# Altium PCB STM32_PCB.PcbDoc (part 1 of 3)
Units mm, origin at the board's own origin, x right, y up, seen from the top; angles counter-clockwise.
Board outline 112.45 x 84.2 mm, 4 copper layers (Top Layer, Int1 (GND), Int2 (PWR), Bottom Layer), stack 1.479 mm thick; 174 components, 200 nets, 660 pads, 398 vias.
Unrouted connection lines stored in the file: 12.
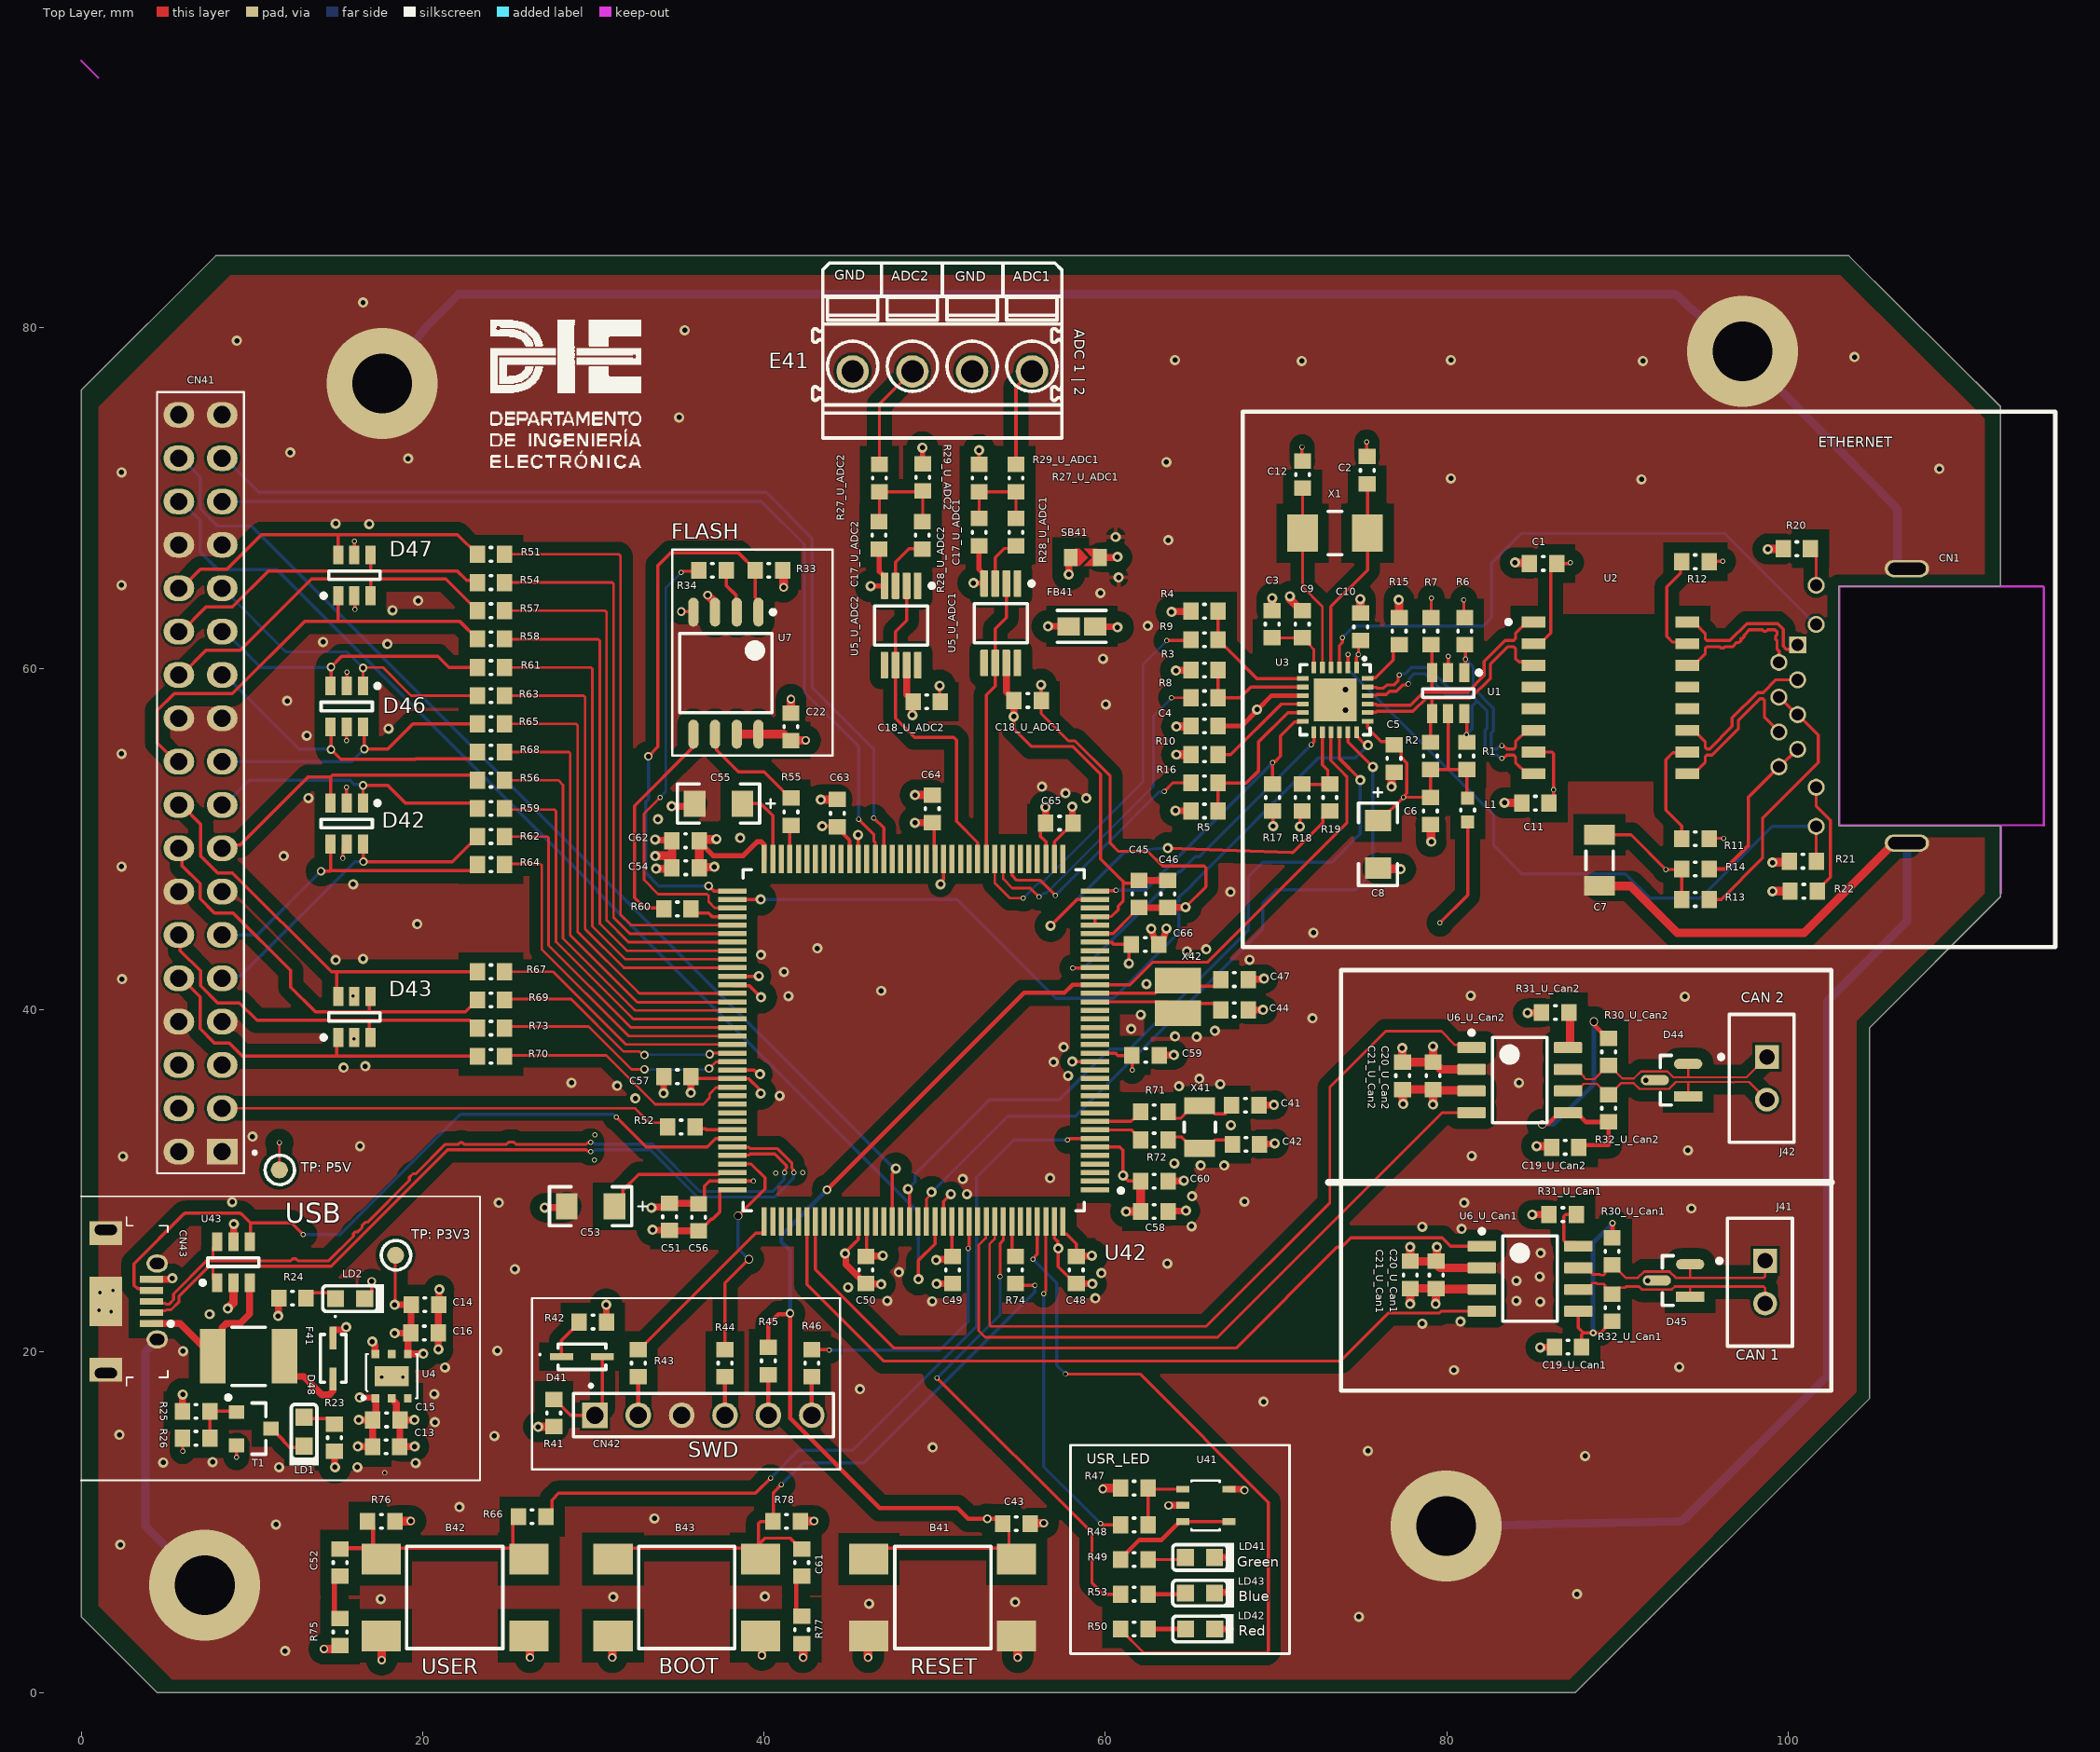
[diagram p0: Top Layer view]
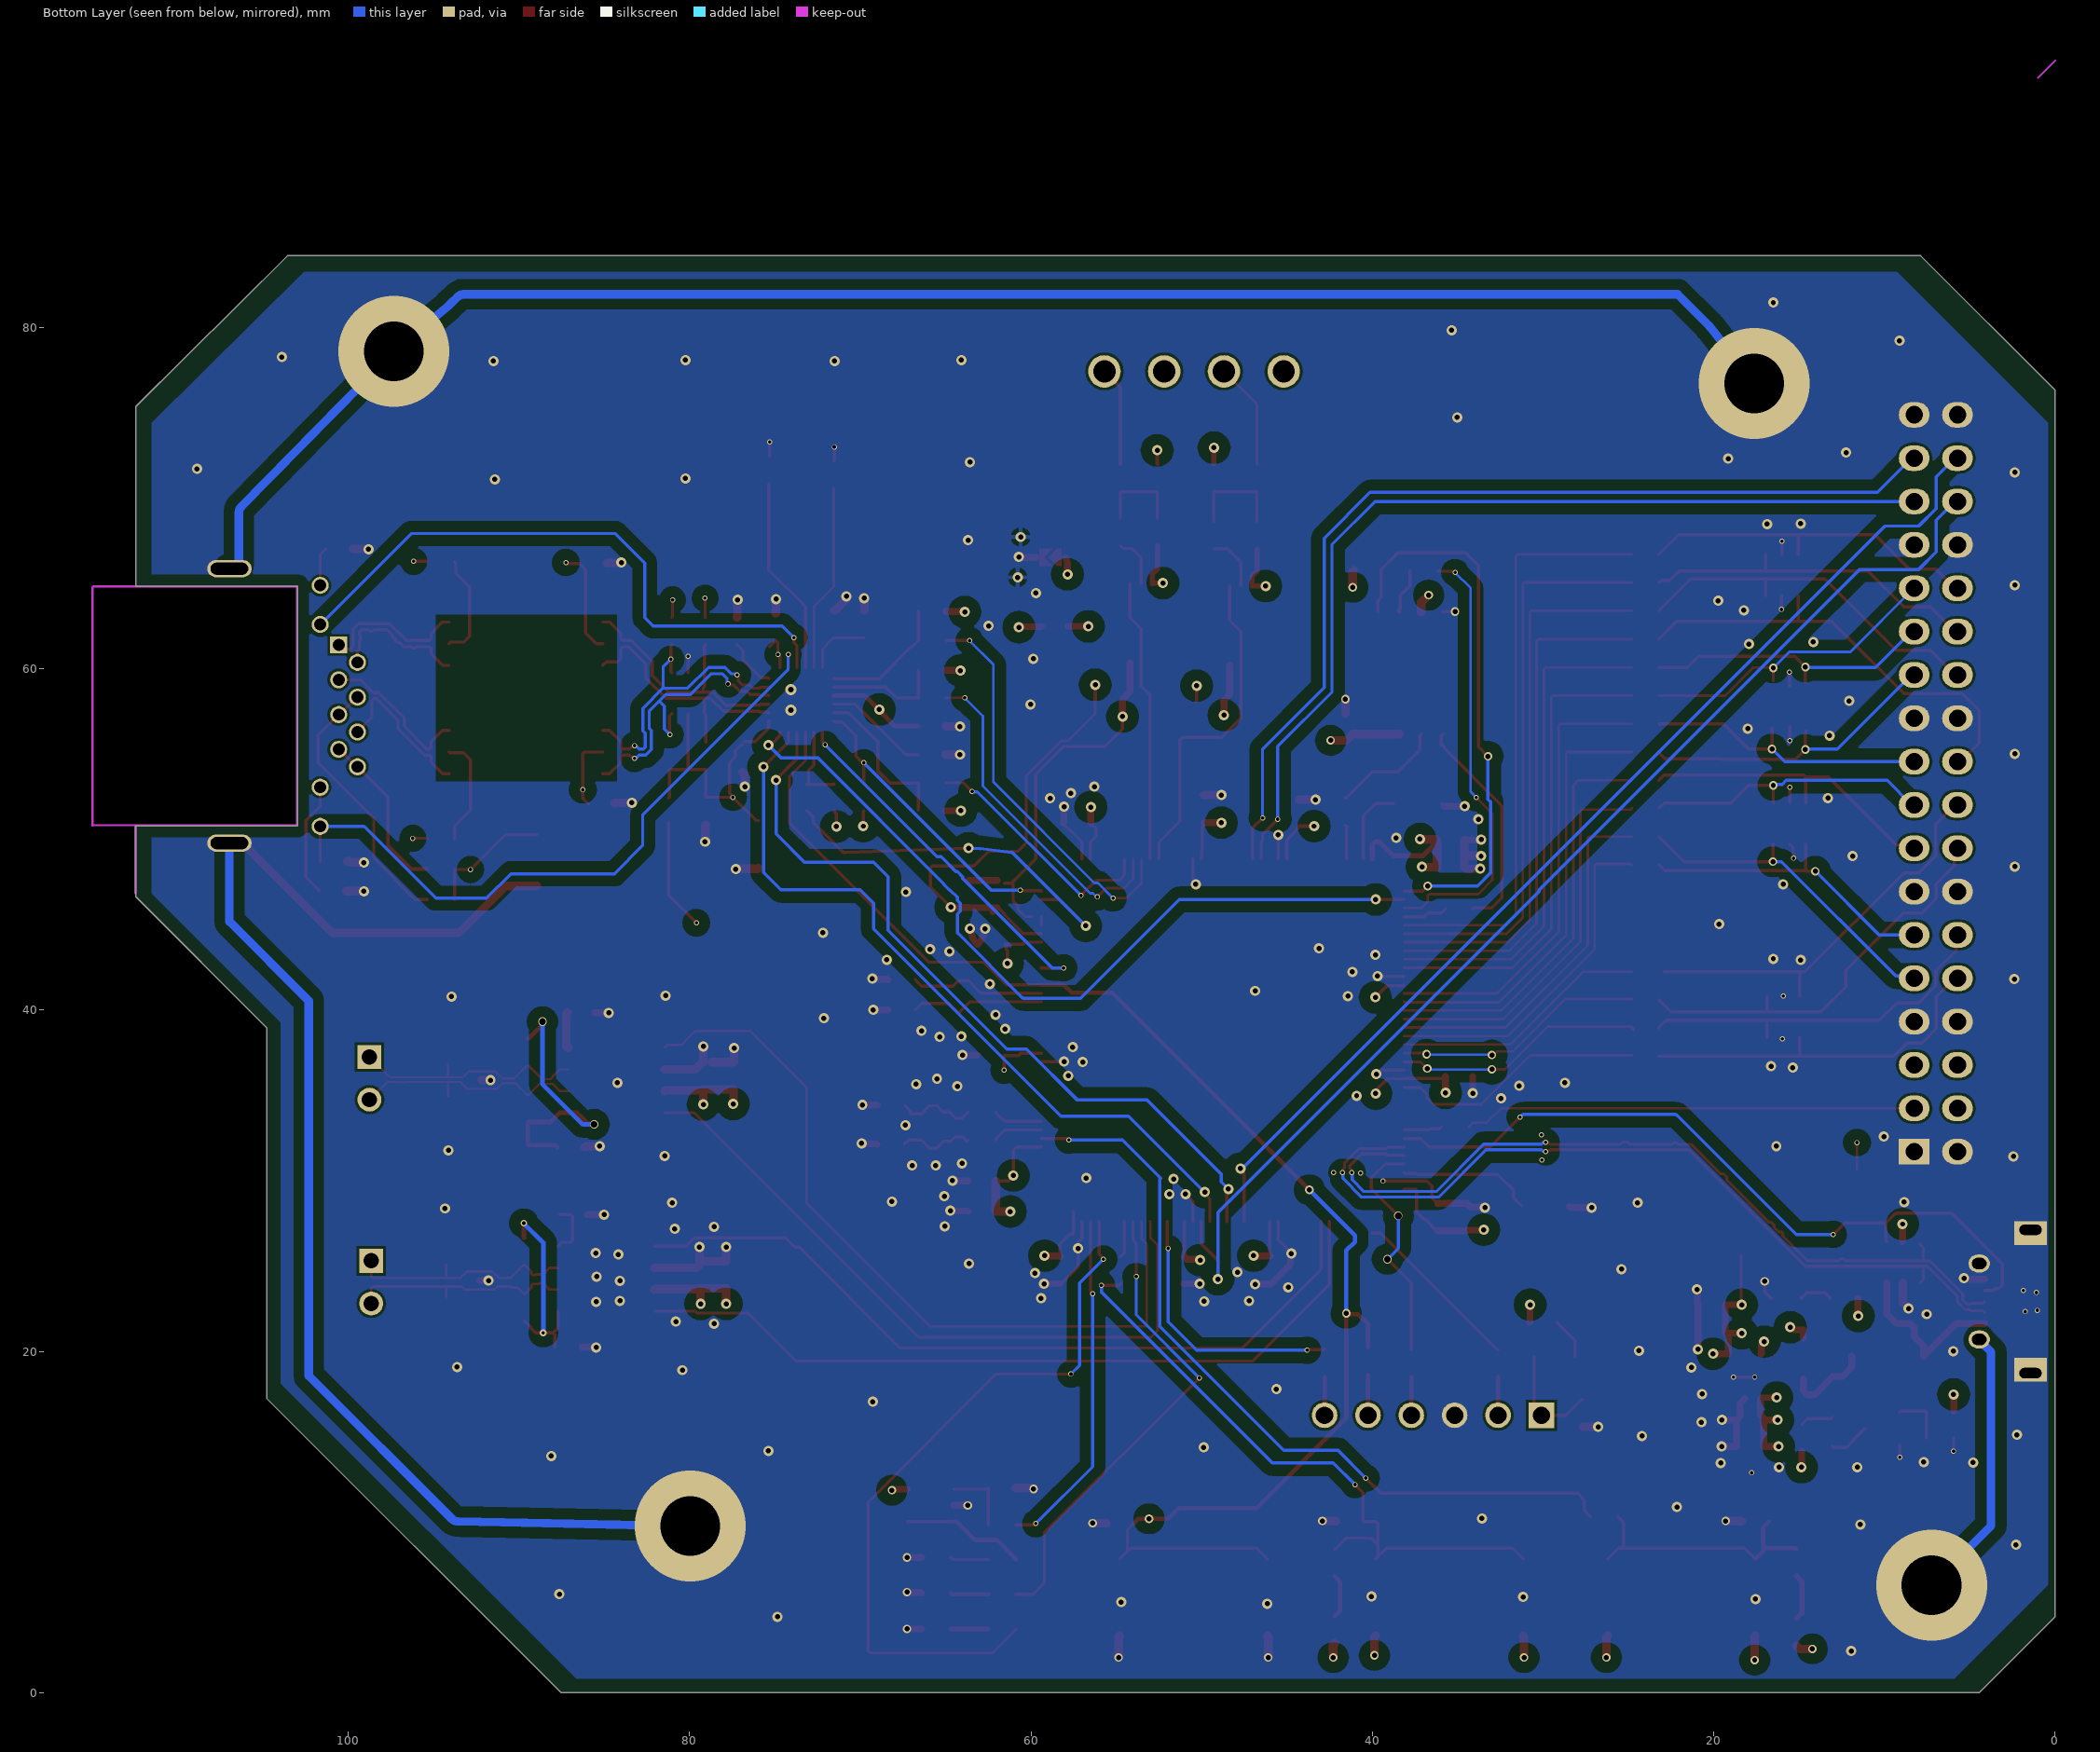
[diagram p1: Bottom Layer view, seen from below]
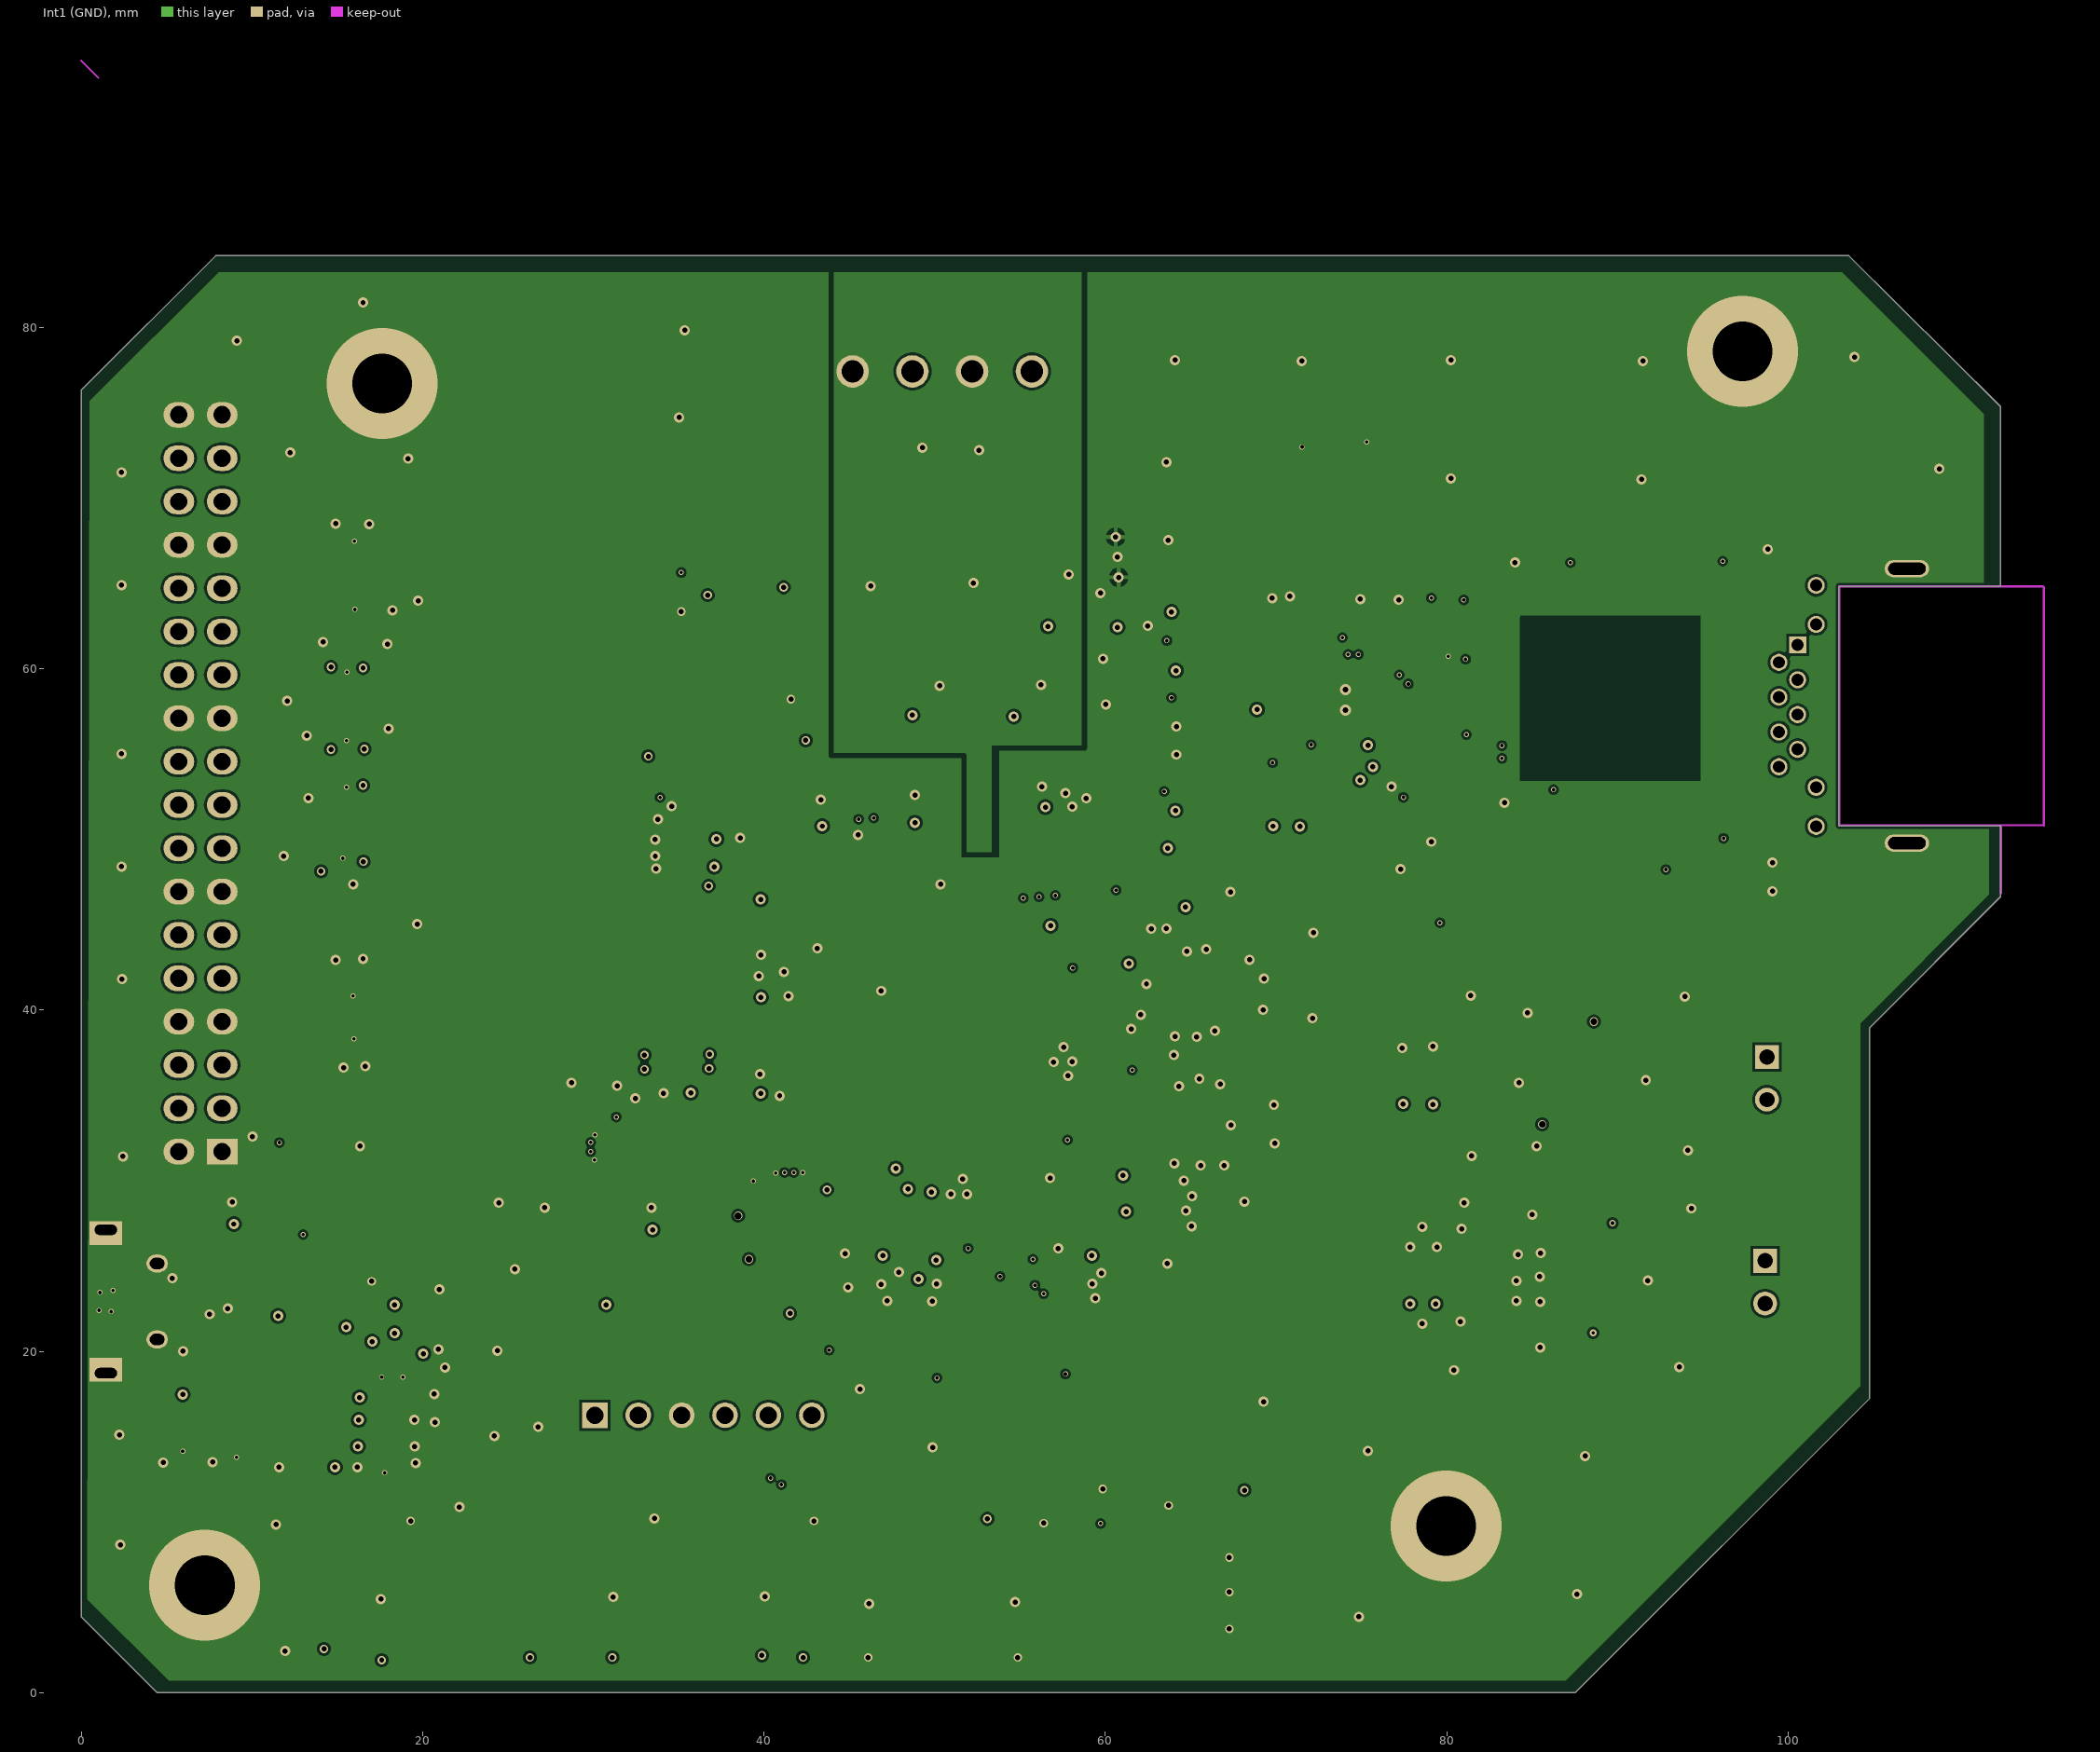
[diagram p2: Int1 (GND)]
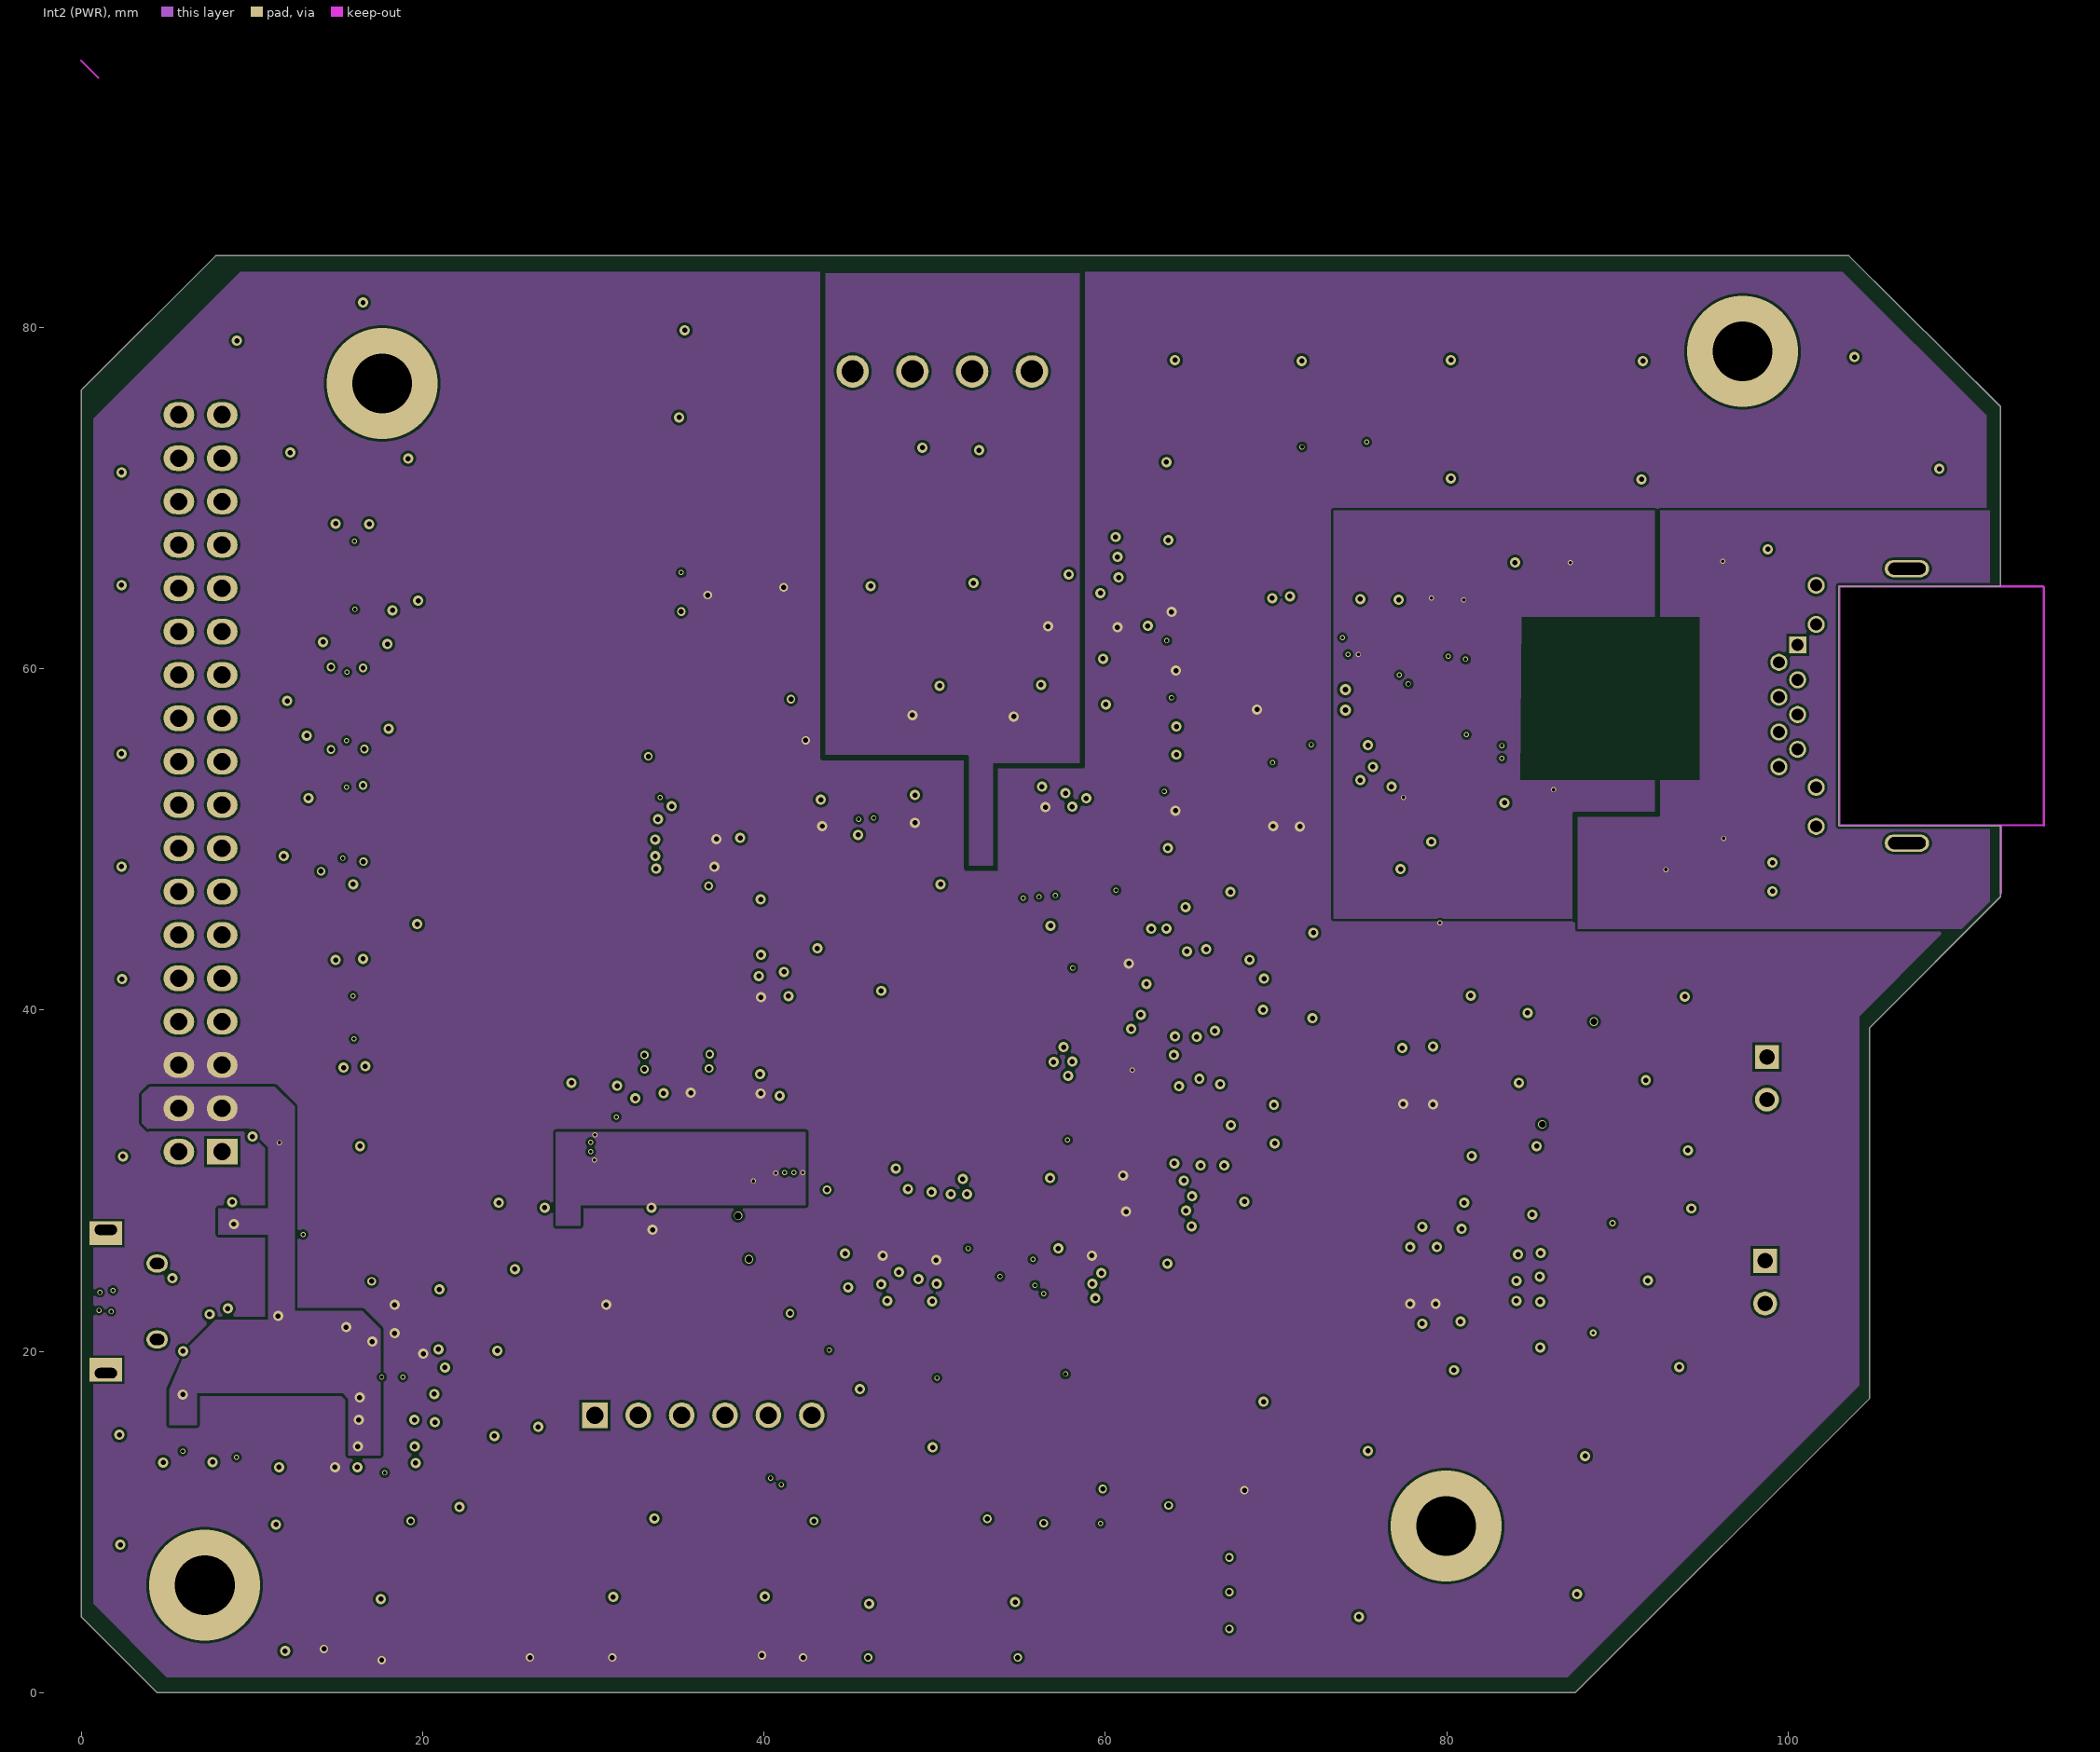
[diagram p3: Int2 (PWR)]

## Layer stack, top to bottom
Top Solder: solder mask 0.0254, SM-001, Dk 4
Top Layer: signal copper 0.0175
Dielectric 1: prepreg 0.066, PP-004, Dk 3.8
Dielectric 2: prepreg 0.0711, PP-006, Dk 4.1
Int1 (GND): signal copper 0.035
Dielectric 3: core 1.1, Core-039, Dk 4.8
Int2 (PWR): signal copper 0.035
Dielectric 4: prepreg 0.0711, PP-006, Dk 4.1
Dielectric 5: prepreg 0.066, PP-004, Dk 3.8
Bottom Layer: signal copper 0.0175
Bottom Solder: solder mask 0.0254, SM-001, Dk 4

## Board outline
112.446,50.825 112.42,50.8 102.972,50.8 102.972,64.795 102.997,64.821 112.446,64.821 112.446,75.362 103.556,84.201 7.874,84.201 0,76.327 0,4.445 4.445,0 62.306,0 87.528,0 104.776,17.247 104.776,38.964 112.446,46.634

## Design rules (kind name [scope] priority, off if disabled: settings)
Clearance Clearance_DiffPair_Via_N [InNet('DATA_N') vs InNet('DATA_N')] p1: gap=0.6 ignorepadtopadclearanceinfootprint=FALSE // Data N
Clearance Clearance_DiffPair_Via_P [InNet('DATA_P') vs InNet('DATA_P')] p2: gap=0.6 ignorepadtopadclearanceinfootprint=FALSE // Data P
Clearance Clearance_top [OnLayer('Top Layer')] p3: gap=0.15 ignorepadtopadclearanceinfootprint=TRUE except(0.65: Arc-Fill Arc-Poly Arc-Region Track-Fill Track-Poly Track-Region SMDPad-Fill SMDPad-Poly SMDPad-Region Via-Fill Via-Poly Via-Region)
Clearance Clearance_bot [OnLayer('Bottom Layer')] p4: gap=0.15 ignorepadtopadclearanceinfootprint=TRUE except(0.65: Arc-Fill Arc-Poly Arc-Region Track-Fill Track-Poly Track-Region SMDPad-Fill SMDPad-Poly SMDPad-Region Via-Fill Via-Poly Via-Region)
Clearance [All] p5: gap=0.15 ignorepadtopadclearanceinfootprint=TRUE
DiffPairsRouting DiffPairsRouting_ethernet_Td [InDifferentialPair('TD')] p1: maxlimit=0.181 minlimit=0.181 mostfreqgap=0.181 toplayer_maxgap=0.181 toplayer_prefgap=0.181 toplayer_minwidth=0.182 toplayer_maxwidth=0.182 toplayer_prefwidth=0.182 bottomlayer_mingap=0.181 bottomlayer_minwidth=0.182 bottomlayer_maxwidth=0.182 bottomlayer_prefwidth=0.182 impedanceprofiledriven=TRUE impedanceprofileid={E97F621E-118A-47BD-B1E5-0E9AAD145150} impedanceprofilevalue=100.000000 maxuncoupledlength=12.7
DiffPairsRouting DiffPairsRouting_ethernet_Tx [InDifferentialPair('TX')] p2: maxlimit=0.181 minlimit=0.181 mostfreqgap=0.181 toplayer_maxgap=0.181 toplayer_prefgap=0.181 toplayer_minwidth=0.182 toplayer_maxwidth=0.182 toplayer_prefwidth=0.182 bottomlayer_mingap=0.181 bottomlayer_minwidth=0.182 bottomlayer_maxwidth=0.182 bottomlayer_prefwidth=0.182 impedanceprofiledriven=TRUE impedanceprofileid={E97F621E-118A-47BD-B1E5-0E9AAD145150} impedanceprofilevalue=100.000000 maxuncoupledlength=12.7
DiffPairsRouting DiffPairsRouting_ethernet_Rd [InDifferentialPair('RD')] p3: maxlimit=0.181 minlimit=0.181 mostfreqgap=0.181 toplayer_maxgap=0.181 toplayer_prefgap=0.181 toplayer_minwidth=0.182 toplayer_maxwidth=0.182 toplayer_prefwidth=0.182 bottomlayer_mingap=0.181 bottomlayer_minwidth=0.182 bottomlayer_maxwidth=0.182 bottomlayer_prefwidth=0.182 impedanceprofiledriven=TRUE impedanceprofileid={E97F621E-118A-47BD-B1E5-0E9AAD145150} impedanceprofilevalue=100.000000 maxuncoupledlength=12.7
DiffPairsRouting DiffPairsRouting_ethernet_Rx [InDifferentialPair('RX')] p4: maxlimit=0.181 minlimit=0.181 mostfreqgap=0.181 toplayer_maxgap=0.181 toplayer_prefgap=0.181 toplayer_minwidth=0.182 toplayer_maxwidth=0.182 toplayer_prefwidth=0.182 bottomlayer_mingap=0.181 bottomlayer_minwidth=0.182 bottomlayer_maxwidth=0.182 bottomlayer_prefwidth=0.182 impedanceprofiledriven=TRUE impedanceprofileid={E97F621E-118A-47BD-B1E5-0E9AAD145150} impedanceprofilevalue=100.000000 maxuncoupledlength=12.7
DiffPairsRouting DiffPairsRouting_usb [InDifferentialPair('DATA')] p5: maxlimit=0.15 minlimit=0.15 mostfreqgap=0.15 toplayer_minwidth=0.17 toplayer_maxwidth=0.17 toplayer_prefwidth=0.19 bottomlayer_minwidth=0.17 bottomlayer_maxwidth=0.17 bottomlayer_prefwidth=0.19 impedanceprofiledriven=TRUE impedanceprofileid={497333D0-593B-4ACD-B705-0FEA8F89A51E} impedanceprofilevalue=90.000000 maxuncoupledlength=12.7
DiffPairsRouting DiffPairsRouting_can1 [InDifferentialPair('CAN_U_Can1')] p6: maxlimit=0.874 minlimit=0.2 mostfreqgap=0.874 toplayer_mingap=0.363 toplayer_maxgap=0.363 toplayer_prefgap=0.363 toplayer_minwidth=0.15 toplayer_maxwidth=0.15 toplayer_prefwidth=0.15 bottomlayer_mingap=0.363 bottomlayer_maxgap=0.363 bottomlayer_prefgap=0.363 bottomlayer_minwidth=0.15 bottomlayer_maxwidth=0.15 bottomlayer_prefwidth=0.15 impedanceprofiledriven=TRUE impedanceprofileid={274D2B74-3016-48D9-B676-2E77227BFF66} impedanceprofilevalue=120.000000 maxuncoupledlength=12.7
DiffPairsRouting DiffPairsRouting_can2 [InDifferentialPair('CAN_U_Can2')] p7 off: maxlimit=0.874 minlimit=0.2 mostfreqgap=0.874 toplayer_mingap=0.363 toplayer_maxgap=0.363 toplayer_prefgap=0.363 toplayer_minwidth=0.15 toplayer_maxwidth=0.15 toplayer_prefwidth=0.15 bottomlayer_mingap=0.363 bottomlayer_maxgap=0.363 bottomlayer_prefgap=0.363 bottomlayer_minwidth=0.15 bottomlayer_maxwidth=0.15 bottomlayer_prefwidth=0.15 impedanceprofiledriven=TRUE impedanceprofileid={274D2B74-3016-48D9-B676-2E77227BFF66} impedanceprofilevalue=120.000000 maxuncoupledlength=12.7
HoleSize [All] p1: absolutevalues=TRUE maxlimit=3.5 minlimit=0.2 maxpercent=80.000 minpercent=20.000
MatchedLengths "Schematic Matched Net Lengths_7" [InNet('PA1')] p1: tolerance=2 checknetsindiffpair=FALSE checkdiffpairvsdiffpair=TRUE checkxsignals=TRUE checkothers=TRUE
MatchedLengths "Schematic Matched Net Lengths_6" [InNet('PG11')] p2: tolerance=2 checknetsindiffpair=FALSE checkdiffpairvsdiffpair=TRUE checkxsignals=TRUE checkothers=TRUE
MatchedLengths "Schematic Matched Net Lengths_5" [InNet('PG13')] p3: tolerance=2 checknetsindiffpair=FALSE checkdiffpairvsdiffpair=TRUE checkxsignals=TRUE checkothers=TRUE
MatchedLengths "Schematic Matched Net Lengths_4" [InNet('PB13')] p4: tolerance=2 checknetsindiffpair=FALSE checkdiffpairvsdiffpair=TRUE checkxsignals=TRUE checkothers=TRUE
MaxMinImpedance [All] p1: minimum=50.00 maximum=120.0
MinimumSolderMaskSliver [All] p1: minsoldermaskwidth=0.07
OvershootFalling OvershootEthernet [InNet('RD_N')] p1: maximum=500.0m
OvershootRising [All] p1: maximum=1.000
PlaneClearance [All] p1: clearance=0.3
PlaneConnect [All] p1: planeconnectstyle=Direct reliefexpansion=0.508 reliefentries=4 reliefconductorwidth=0.254 reliefairgap=0.254
PolygonConnect [All] p1: connectstyle=Direct reliefconductorwidth=0.254 reliefentries=4 polygonreliefangle="90 Angle" airgapwidth=0.254
RoomDefinition U_MCU_144 [InComponentClass('U_MCU_144')] p1 off: confinementstyle=ConfineIn formatcopy=TRUE lockcomponents=FALSE outline 30.861,20.066 70.231,20.066 70.231,54.229 30.861,54.229
RoomDefinition U_Ethernet [InComponentClass('U_Ethernet')] p2 off: confinementstyle=ConfineIn formatcopy=TRUE lockcomponents=FALSE outline 70.866,43.942 127,43.942 127,75.057 70.866,75.057
RoomDefinition U_Connectors [InComponentClass('U_Connectors')] p3 off: confinementstyle=ConfineIn formatcopy=TRUE lockcomponents=FALSE outline 2.159,29.718 28.067,29.718 28.067,77.343 2.159,77.343
RoomDefinition U_USB [InComponentClass('U_USB')] p4 off: confinementstyle=ConfineIn formatcopy=TRUE lockcomponents=FALSE outline -0.127,11.811 20.701,11.811 20.701,29.083 -0.127,29.083
RoutingVias RoutingVias_DiffPairs [InDifferentialPairClass('All Differential Pairs')] p1: holewidth=0.2 width=0.3 viastyle="Through Hole" minholewidth=0.2 minwidth=0.3 maxholewidth=0.3 maxwidth=0.5
RoutingVias RoutingVias_generic [All] p2: holewidth=0.4 width=0.5 viastyle="Through Hole" minholewidth=0.2 minwidth=0.3 maxholewidth=1 maxwidth=1.2 // Via metalizada generica para clase 6
SignalStimulus Ethernet [All] p1: kind=1 level=0 starttime=10.00n stoptime=30.00n periodtime=40.00n
SilkToSilkClearance [All] p1: silktosilkclearance=0.15
SilkToSolderMaskClearance [IsPad] p1: minsilkscreentomaskgap=0.125 clearancetoexposedcopper=TRUE
SolderMaskExpansion [All] p1: expansion=0 istentingtop=FALSE
SupplyNets "Schematic Supply Nets_4" [InNet('GND')] p1: voltage=0.000
SupplyNets "Schematic Supply Nets_5" [InNet('AVDD')] p2: voltage=0.000
SupplyNets "Schematic Supply Nets_3" [InNet('USB_PWR')] p3: voltage=0.000
SupplyNets "Schematic Supply Nets_2" [InNet('P3V3')] p4: voltage=0.000
SupplyNets "Schematic Supply Nets" [InNet('AGND')] p5: voltage=0.000
UndershootFalling [All] p1: maximum=1.000
UndershootRising [All] p1: maximum=500.0m
UnpouredPolygon UnpouredPolygon_1 [All] p1:
UnpouredPolygon [All] p2:
Width Width_RMII_TX [InNetClass('RMII_TX')] p1: maxlimit=0.249 minlimit=0.19 preferedwidth=0.23 toplayer_prefwidth=0.249 bottomlayer_maxwidth=0.23 impedanceprofiledriven=TRUE impedanceprofileid={1FD0D523-0561-4C48-BDE8-8C62BAB84EE3} impedanceprofilevalue=50.000000 minimp=50.000000 maximp=50.000000 favimp=50.000000
Width Width_generic_50 [All] p2: maxlimit=1 minlimit=0.15 preferedwidth=0.23 toplayer_prefwidth=0.249 impedanceprofiledriven=TRUE impedanceprofileid={1FD0D523-0561-4C48-BDE8-8C62BAB84EE3} impedanceprofilevalue=50.000000 minimp=50.000000 maximp=50.000000 favimp=50.000000 // Ancho de pista generico clase 6
22 further rules are at their usual default settings.

## Classes and differential pairs
net class ConG[2..8]: ConG2 ConG3 ConG4 ConG5 ConG6 ConG7 ConG8
net class ConD[8..15]: ConD8 ConD9 ConD10 ConD11 ConD12 ConD13 ConD14 ConD15
channel class CAN: U_Can1 U_Can2
channel class ADC: U_ADC1 U_ADC2
net class PH[0..2]: PH0 PH1 PH2
net class PG[0..15]: PG0 PG1 PG2 PG3 PG4 PG5 PG6 PG7 PG8 PG9 PG10 PG11 PG12 PG13 PG14 PG15
net class PF[0..15]: PF0 PF1 PF2 PF3 PF4 PF5 PF6 PF7 PF8 PF9 PF10 PF11
net class PE[0..15]: PE0 PE1 PE2 PE3 PE4 PE5 PE6 PE7 PE8 PE9 PE10 PE11 PE12 PE13 PE14 PE15
net class PD[0..15]: PD0 PD1 PD2 PD3 PD4 PD5 PD6 PD7 PD8 PD9 PD10 PD11 PD12 PD13 PD14 PD15
net class PC[0..15]: PC0 PC1 PC2 PC3 PC4 PC5 PC6 PC7 PC8 PC9 PC10 PC11 PC12 PC13 PC14 PC15
net class PB[0..15]: PB0 PB1 PB2 PB3 PB4 PB5 PB6 PB7 PB8 PB9 PB10 PB11 PB12 PB13 PB14 PB15
net class PA[0..15]: PA0 PA1 PA2 PA3 PA4 PA5 PA6 PA7 PA8 PA9 PA10 PA11 PA12 PA13 PA14 PA15
component class U_USB: CN43 D6 D46 F41 U43
component class U_MCU_144: B42 B43 C41 C42 C43 C45 C46 C47 C52 C53 C56 C57 C59 C62 C63 FB41 LD43 R20 R21 R35 R51 R53 R54 R57 R59 R60 R63 R65 R66 R70 R73 R75 R78 SB41 U42 X41 X42
component class U_Flash: C22 R33 R34 U7
component class U_Ethernet: C1 C2 C3 C6 C8 C9 C12 CN1 L1 R1 R2 R3 R4 R7 R8 R9 R12 R17 R18 R19 R20 R21 R22 U1 U2 U3 X1
component class U_Connectors: CN41 CN42 D41 D42 D43 D45 D46 E41 J41 J42 LD41 R41 R42 R43 R44 R45 R46 R47 R48 R49 U41
component class U_Can2: C19_c2 C19_U_Can2 C20_c2 C20_U_Can2 C21_U_Can2 R30_U_Can2 R31_U_Can2 R32_U_Can2 U6_U_Can2
component class U_Can1: C19_U_Can1 C21_U_Can1 R30_U_Can1 R31_U_Can1 R32_U_Can1 U6_U_Can1
component class U_Alimentacion: * C13 C14 C15 C16 LD1 LD2 R23 R24 R25 R26 T1 U4
component class U_ADC2: C18_U_ADC2 R27_U_ADC2 R28_U_ADC2 R29_U_ADC2 U5_U_ADC2
component class U_ADC1: C18_U_ADC1 R27_U_ADC1 R28_U_ADC1 R29_U_ADC1 U5_U_ADC1
differential pair TX: +TX_P -TX_N
differential pair RX: +RX_P -RX_N
differential pair TD: +TD_P -TD_N
differential pair RD: +RD_P -RD_N
differential pair DATA: +DATA_P -DATA_N
differential pair CAN_U_Can2: +CAN_U_Can2_P -CAN_U_Can2_N
differential pair CAN_U_Can1: +CAN_U_Can1_P -CAN_U_Can1_N

## Components (designator, comment, footprint, x,y, rotation, side; value= is the part's Value field where it differs from the comment)
B41 "RESET (Black)" PB-6X6mm-Black 50.47,5.581 r180 top
B42 "USER (Blue)" PB-6X6mm-Blue 21.895,5.581 r0 top
B43 "BOOT0" PB-6X6mm-Blue 35.484,5.581 r0 top
C1 "100nF" 0603C 85.649,66.167 r0 top
C2 "30pF" 0603C 75.336,71.628 r90 top value=100nF
C3 "470pF" 0603C 69.774,62.611 r270 top value=100nF
C4 "100nF" 0603C 65.805,56.642 r0 top
C5 "100nF" 0603C 76.911,54.737 r90 top
C6 "100nF" 0603C 79.045,51.664 r90 top
C7 "TC1206KKX7RDBB102" 1206C 88.951,48.768 r90 top value=100nF
C8 "10uF" TAN-A 75.971,49.708 r90 top
C9 "1uF_X5R_0603" 0603C 71.533,62.611 r90 top value=1µF
C10 "100nF" 0603C 74.955,62.459 r270 top
C11 "100nF" 0603C 85.192,52.121 r0 top
C12 "30pF" 0603C 71.552,71.374 r90 top value=100nF
C13 "1uF" 0603C 17.859,14.402 r0 top value=1µF
C14 "1uF" 0603C 20.134,22.738 r0 top value=1µF
C15 "100nF" 0603C 17.882,15.977 r180 top
C16 "100nF" 0603C 20.109,21.075 r180 top
C17_U_ADC1 "100nF" 0603C 52.603,67.996 r270 top (schematic designator C17)
C17_U_ADC2 "100nF" 0603C 46.736,67.818 r270 top (schematic designator C17)
C18_U_ADC1 "100nF" 0603C 55.448,58.141 r0 top (schematic designator C18)
C18_U_ADC2 "100nF" 0603C 49.53,58.064 r0 top (schematic designator C18)
C19_U_Can1 "4.7nF" 0603C 87.1,20.254 r180 top (schematic designator C19)
C19_U_Can2 "4.7nF" 0603C 86.944,31.953 r180 top (schematic designator C19)
C20_U_Can1 "47uF" 0603C 79.381,24.48 r270 top (schematic designator C20)
C20_U_Can2 "47uF" 0603C 79.197,36.144 r270 top (schematic designator C20)
C21_U_Can1 "100nF" 0603C 77.857,24.48 r270 top (schematic designator C21)
C21_U_Can2 "100nF" 0603C 77.419,36.144 r270 top (schematic designator C21)
C22 "100nF" 0603C 41.58,56.591 r270 top
C41 "4.3pF[N/A]" 0603C 68.199,34.417 r0 top
C42 "4.3pF[N/A]" 0603C 68.237,32.131 r0 top
C43 "100nF" 0603C 54.788,9.906 r180 top value=100pF
C44 "4.3pF" 0603C 67.564,40.005 r0 top
C45 "100nF" 0603C 61.969,46.799 r270 top value=10nF
C46 "1uF" 0603C 63.652,46.799 r270 top value=10nF
C47 "4.3pF" 0603C 67.564,41.783 r0 top
C48 "100nF" 0603C 58.293,24.765 r270 top value=10nF
C49 "100nF" 0603C 51.054,24.765 r270 top value=10nF
C50 "100nF" 0603C 45.974,24.765 r270 top value=10nF
C51 "100nF" 0603C 34.463,27.877 r90 top value=10nF
C52 "100nF" 0603C 15.164,7.62 r90 top value=100pF
C53 "2.2uF_X7R" TAN-A 29.845,28.499 r0 top value=2.2uF
C54 "10uF_X5R_0603" 0603C 35.408,48.336 r180 top value=1µF
C55 "2.2uF_X7R" TAN-A 37.338,52.095 r0 top value=2.2uF
C56 "100nF" 0603C 36.17,27.851 r90 top value=10nF
C57 "100nF" 0603C 34.925,36.093 r180 top value=10nF
C58 "100nF" 0603C 62.865,28.194 r0 top value=10nF
C59 "100nF" 0603C 62.357,37.338 r0 top value=10nF
C60 "1uF_X5R_0603" 0603C 62.865,29.972 r0 top value=1µF
C61 "100nF" 0603C 42.215,7.62 r90 top value=100pF
C62 "100nF" 0603C 35.404,49.916 r180 top value=10nF
C63 "100nF" 0603C 44.298,51.537 r90 top value=10nF
C64 "100nF" 0603C 49.86,51.791 r90 top value=10nF
C65 "100nF" 0603C 57.302,50.952 r0 top value=10nF
C66 "4.7uF_X5R_0603" 0603C 62.332,43.84 r0 top value=1µF
CN1 "KRJ-CB4.2GYZNL" RJ45_KRJ-CB4.2GYZNL 103.209,57.822 r90 top
CN41 "Header 18X2_Male" HDR_2x18_2R54_V_M 8.255,31.699 r90 top
CN42 "Header 6X1" HDR_1x6_2R54_V_M 30.099,16.256 r0 top
CN43 "475900001" MOLEX_47590001 4.12,22.921 r270 top
D41 "BAT60JFILM" SOD-323 29.337,19.685 r180 top
D42 "ESDA6V1BC6" SOT23-6L 15.552,50.927 r270 top
D43 "ESDA6V1BC6" SOT23-6L 16.002,39.592 r90 top
D44 "PESD2CANFD24V-TR" FP-SOT23-IPC_A 93.167,35.89 r180 top
D45 "PESD2CANFD24V-TR" FP-SOT23-IPC_A 93.282,24.151 r180 top
D46 "ESDA6V1BC6" SOT23-6L 15.552,57.785 r270 top
D47 "ESDA6V1BC6" SOT23-6L 16.002,65.475 r90 top
D48 "BAT60JFILM" SOD-323 14.757,19.583 r90 top
E41 "1845040000" LM_3_5_90_04 50.444,77.673 r180 top
F41 "MF-MSMF050-2" FP-MF-MSMF050-2-MFG 9.804,19.71 r180 top value=0.15-1Ω
FB41 "BLM18PG121SN1D" FP-BLM18-0_15-t0_8-IPC_A 58.623,62.484 r180 top
J41 "B2B-EH-A(LF)(SN)" FP-B2B-EH-A_LF_SN-MFG 98.349,24.054 r270 top
J42 "B2B-EH-A(LF)(SN)" FP-B2B-EH-A_LF_SN-MFG 98.455,35.997 r270 top
L1 "BEAD" 0603L 81.229,51.714 r90 top value=100uH
LD1 "Green" 0603D-G 13.056,15.291 r90 top
LD2 "Green" 0603D-G 15.748,23.089 r180 top
LD41 "Green" 0603D-G 65.546,7.925 r180 top
LD42 "Red" 0603D-R 65.552,3.734 r180 top
LD43 "Blue" 0603D-B 65.544,5.832 r180 top
R1 "50" 0603R 81.178,54.889 r270 top
R2 "50" 0603R 79.045,54.889 r270 top
R3 "10K" 0603R 65.805,59.917 r0 top
R4 "10K" 0603R 65.805,63.373 r0 top
R5 "10K" 0603R 65.805,51.662 r0 top
R6 "50" 0603R 81.051,62.205 r90 top
R7 "50" 0603R 79.07,62.205 r90 top
R8 "33" 0603R 65.805,58.293 r180 top
R9 "33" 0603R 65.805,61.695 r180 top
R10 "10K" 0603R 65.805,54.964 r180 top
R11 "75" 0603R 94.564,50.038 r180 top value=50
R12 "75" 0603R 94.564,66.269 r180 top value=50
R13 "75" 0603R 94.564,46.482 r0 top value=50
R14 "75" 0603R 94.564,48.26 r0 top value=50
R15 "12K1" 0603R 77.216,62.205 r90 top
R16 "33" 0603R 65.805,53.313 r180 top
R17 "1K5" 0603R 69.799,52.451 r270 top
R18 "10K" 0603R 71.526,52.451 r90 top
R19 "33" 0603R 73.152,52.451 r270 top
R20 "270" 0603R 100.508,67.031 r180 top value=10K
R21 "10K" 0603R 100.863,48.717 r180 top
R22 "270" 0603R 100.914,46.965 r180 top value=10K
R23 "330" 0603R 14.834,14.935 r270 top value=1K
R24 "1K" 0603R 12.37,23.114 r180 top value=10K
R25 "47K" 0603R 6.731,16.485 r0 top value=1K
R26 "22K" 0603R 6.731,14.91 r0 top value=1K
R27_U_ADC1 "100K" 0603R 54.762,71.171 r90 top value=10K (schematic designator R27)
R27_U_ADC2 "100K" 0603R 46.761,71.171 r90 top value=10K (schematic designator R27)
R28_U_ADC1 "1K" 0603R 54.762,67.996 r270 top value=10K (schematic designator R28)
R28_U_ADC2 "1K" 0603R 49.276,67.818 r270 top value=10K (schematic designator R28)
R29_U_ADC1 "220K" 0603R 52.603,71.171 r270 top value=10K (schematic designator R29)
R29_U_ADC2 "220K" 0603R 49.301,71.209 r270 top value=10K (schematic designator R29)
R30_U_Can1 "60 Ohm" 0603R 89.687,25.857 r270 top value=60 (schematic designator R30)
R30_U_Can2 "60 Ohm" 0603R 89.484,37.541 r270 top value=60 (schematic designator R30)
R31_U_Can1 "0 Ohm" 0603R 86.792,28.016 r180 top value=1K (schematic designator R31)
R31_U_Can2 "0 Ohm" 0603R 86.36,39.853 r180 top value=1K (schematic designator R31)
R32_U_Can1 "60 Ohm" 0603R 89.687,22.555 r270 top value=60 (schematic designator R32)
R32_U_Can2 "60 Ohm" 0603R 89.484,34.239 r270 top value=60 (schematic designator R32)
R33 "10k" 0603R 40.284,65.761 r0 top value=1K
R34 "33" 0603R 36.982,65.761 r0 top value=1K
R41 "10K" 0603R 27.686,16.383 r270 top
R42 "100" 0603R 29.972,21.717 r0 top value=10K
R43 "22" 0603R 32.639,19.304 r90 top value=10K
R44 "22" 0603R 37.719,19.304 r90 top value=10K
R45 "22" 0603R 40.259,19.431 r90 top value=10K
R46 "22" 0603R 42.799,19.304 r90 top value=10K
R47 "200K" 0603R 61.697,11.989 r180 top value=1K
R48 "10K" 0603R 61.697,9.83 r180 top value=1K
R49 "510" 0603R 61.697,7.798 r0 top value=1K
R50 "1K" 0603R 61.697,3.734 r180 top
R51 "100" 0603R 24.003,66.7 r180 top value=10K
R52 "10k" 0603R 35.154,33.147 r0 top value=1K
R53 "680" 0603R 61.697,5.766 r0 top value=1K
R54 "100" 0603R 24.003,65.049 r180 top value=10K
R55 "33" 0603R 41.587,51.62 r90 top
R56 "100" 0603R 24.003,53.467 r0 top value=10K
R57 "100" 0603R 24.003,63.398 r180 top value=10K
R58 "100" 0603R 24.003,61.747 r180 top value=10K
R59 "100" 0603R 24.003,51.816 r0 top value=10K
R60 "33" 0603R 34.925,45.923 r180 top value=1K
R61 "100" 0603R 24.003,60.071 r180 top value=10K
R62 "100" 0603R 24.003,50.165 r180 top value=10K
R63 "100" 0603R 24.003,58.42 r0 top value=10K
R64 "100" 0603R 24.003,48.514 r180 top value=10K
R65 "100" 0603R 24.003,56.769 r180 top value=10K
R66 "330" 0603R 26.416,10.312 r0 top value=1K
R67 "100" 0603R 24.003,42.24 r0 top value=10K
R68 "100" 0603R 24.003,55.118 r0 top value=10K
R69 "100" 0603R 24.003,40.589 r0 top value=10K
R70 "100" 0603R 24.003,37.287 r0 top value=10K
R71 "0" 0603R 62.865,34.036 r180 top value=1K
R72 "0" 0603R 62.865,32.385 r180 top value=1K
R73 "100" 0603R 24.003,38.938 r0 top value=10K
R74 "330" 0603R 54.737,24.765 r270 top value=1K
R75 "100" 0603R 15.164,3.556 r90 top value=1K
R76 "220K" 0603R 17.577,10.033 r0 top value=1K
R77 "100" 0603R 42.215,3.683 r90 top value=1K
R78 "220K" 0603R 41.326,10.033 r0 top value=1K
SB41 "Close" SB_0603 58.826,66.523 r180 top
T1 "9013" SOT-23 10.109,15.469 r270 top
U1 "USBLC6-4SC6" SOT23-6L 80.086,58.572 r270 top
U2 "KMS-1102NL" Transformer 89.586,58.293 r270 top
U3 "LAN8742A-CZ-TR" QFN24_0R5_4X4 73.462,58.178 r270 top
U4 "LD39050PU33R" DFN6_0R95_3x3_TP 18.186,18.542 r0 top
U5_U_ADC1 "OPA350EA/250" DGK0008A_M 53.873,62.662 r270 top (schematic designator U5)
U5_U_ADC2 "OPA350EA/250" DGK0008A_M 48.031,62.535 r270 top (schematic designator U5)
U6_U_Can1 "SN65HVD230QDRG4Q1" D0008A_M 84.881,24.257 r0 top (schematic designator U6)
U6_U_Can2 "SN65HVD230QDRG4Q1" D0008A_M 84.277,35.89 r0 top (schematic designator U6)
U7 "SST25VF040B-50-4I-S2AF" MCHP-SOIC-S2A8_N 37.77,59.741 r270 top
U41 "TSV631AILT" SOT-23-5L 65.888,10.973 r0 top
U42 "MCU_LQFP144" "LQFP144_0R5_SKT - sin_zocalo_UWU" 48.768,38.227 r90 top
U43 "USBLC6-4SC6" SOT23-6L 8.915,25.222 r90 top
X1 "X53T-C20SSA-25.000MHz" XTAL_2SM_5R0X3R2 73.457,67.945 r0 top
X41 "NX3215SA-32.768KHZ-EXS00A-MU00525" XTAL_2SM_3R2X1R5 65.532,33.147 r270 top
X42 "NX3225GD-8.000M-EXS00A-CG04874" OSC_2SM_3R2x2R5 64.262,40.767 r270 top

## Footprints (in the part's own frame and the unit in brackets; to place one, negate y for a bottom-side part, rotate by r counter-clockwise, add the part's x,y. Pads: shape width x height; smd on the part's side, far side on the other; paste and mask are expansions set on the pad)
0603C [mm] "Chip Capacitor, Body 1.6x0.8mm, Height 1.0mm, IPC Medium Density"
  rect 0.9x1 smd: 1(-0.8,0) 2(0.8,0)
  silkscreen extent -0.05,-0.4 0.05,0.4, body extent -0.87,-0.48 0.88,0.47, height 1
0603D-B [mm] "LED, SMT, Body 1.6 x 0.8 mm, 0.25mm Thickness"
  rect 1x1 smd paste+0 mask+0: 1(0.85,0) 2(-0.85,0)
  silkscreen extent -1.99,-0.85 1.6,0.85, body extent -0.8,-0.4 0.8,0.4, height 0.25
0603D-G [mm] "LED, SMT, Body 1.6 x 0.8 mm, 0.25mm Thickness"
  rect 1x1 smd paste+0 mask+0: 1(0.85,0) 2(-0.85,0)
  silkscreen extent -1.99,-0.85 1.6,0.85, body extent -0.8,-0.4 0.8,0.4, height 0.25
0603D-R [mm] "LED, SMT, Body 1.6 x 0.8 mm, 0.25mm Thickness"
  rect 1x1 smd paste+0 mask+0: 1(0.85,0) 2(-0.85,0)
  silkscreen extent -1.97,-0.86 1.6,0.84, body extent -0.8,-0.4 0.8,0.4, height 0.25
0603L [mil] "Bead 0603L"
  rect 30x30 smd: 1(27.5,0) 2(-27.5,0)
  silkscreen extent -2,-16 2,16, body extent -34,-19 34,19, height 24
0603R [mm] "Chip Resistor, Body 1.6x0.8mm, IPC Medium Density"
  rect 0.9x1 smd: 1(-0.8,0) 2(0.8,0)
  silkscreen extent -0.05,-0.4 0.05,0.4, body extent -0.85,-0.47 0.85,0.47, height 0.6
1206C [mm] "Chip Capacitor, Body 3.2x1.6mm, Height 1mm, IPC Medium Density"
  rect 1.15x1.8 smd: 1(-1.5,0) 2(1.5,0)
  silkscreen extent -0.55,-0.8 0.55,0.8, body extent -1.7,-0.9 1.7,0.9, height 1
D0008A_M [mm] "SOIC, 8-Leads, Body 5x4mm, Pitch 1.27mm, IPC Low Density"
  rrect15% 1.65x0.65 smd: 1(-2.825,1.905) 2(-2.825,0.635) 3(-2.825,-0.635) 4(-2.825,-1.905) 5(2.825,-1.905) 6(2.825,-0.635) 7(2.825,0.635) 8(2.825,1.905)
  silkscreen extent -2.95,-2.5 1.6,2.9, body extent -3,-2.45 3,2.45, height 1.63
DFN6_0R95_3x3_TP [mm] "500 mA low quiescent current and low noise voltage regulator"
  rect 2x1.2 smd: 0(0,0)
  rect 0.45x0.5 smd: 1(-0.95,-1.3) 2(0,-1.3) 3(0.95,-1.3) 4(0.95,1.3) 5(0,1.3) 6(-0.95,1.3)
  silkscreen extent -1.71,-1.33 1.5,1.3, body extent -1.5,-1.5 1.5,1.5, height 1
DGK0008A_M [mm] "TSOP, 8-Leads, Body 3.1x3.1mm, Pitch 0.65mm, IPC Low Density"
  rrect22% 1.55x0.45 smd: 1(-2.325,0.975) 2(-2.325,0.325) 3(-2.325,-0.325) 4(-2.325,-0.975) 5(2.325,-0.975) 6(2.325,-0.325) 7(2.325,0.325) 8(2.325,0.975)
  silkscreen extent -2.45,-1.55 1.15,1.92, body extent -2.45,-1.5 2.45,1.5, height 0.94
FP-B2B-EH-A_LF_SN-MFG [mm]
  rect 1.4x1.4 hole 0.9 paste-2539.97 mask+0: 1(-1.25,0.3)
  round 1.4 hole 0.9 paste-2539.97 mask+0: 2(1.25,0.3)
  silkscreen extent -3.75,-2.5 3.75,1.9, body extent -3.85,-2 3.85,2, height 0.25
FP-BLM18-0_15-t0_8-IPC_A [mm]
  rect 1.306x1.058 smd paste+0 mask+0: 1(-0.776,0) 2(0.776,0)
  silkscreen extent -1.43,-0.93 1.43,0.93, body extent -1.93,-1.03 1.93,1.03, height 0.25
FP-MF-MSMF050-2-MFG [mm]
  rect 1.5x3.2 smd paste+0 mask+0: 1(-2.1,0) 2(2.1,0)
  silkscreen extent -0.97,-1.71 0.97,1.71, body extent -2.95,-1.81 2.95,1.81, height 0.25
FP-SOT23-IPC_A [mm]
  rect 1.655x0.602 smd paste+0 mask+0: 1(-0.975,0.95)
  rrect100% 1.655x0.602 smd paste+0 mask+0: 2(-0.975,-0.95) 3(0.975,0)
  silkscreen extent 0,-1.45 0.65,1.45, body extent -2.3,-1.95 2.3,1.95, height 0.25
HDR_1x6_2R54_V_M [mm] "Male Header, Pitch 2.54mm, 6x1 Position, Mated Height 6mm, Tail Length 3mm"
  rect 1.5x1.5 hole 1.02: 1(0,0)
  round 1.5 hole 1.02: 2(2.54,0) 3(5.08,0) 4(7.62,0) 5(10.16,0) 6(12.7,0)
  silkscreen extent -1.27,-1.27 13.97,1.79, body extent -1.27,-1.27 13.97,1.27, height 9
HDR_2x18_2R54_V_M [mm] "Male Header, Pitch 2.54mm, 36x2 Position, Mated Height 6mm, Tail Length 3mm"
  rect 1.5x1.8 hole 1.02: 1(0,0)
  oval 1.5x1.8 hole 1.02: 2(0,2.54) 3(2.54,0) 4(2.54,2.54) 5(5.08,0) 6(5.08,2.54) 7(7.62,0) 8(7.62,2.54) 9(10.16,0) 10(10.16,2.54) 11(12.7,0) 12(12.7,2.54) 13(15.24,0) 14(15.24,2.54) 15(17.78,0) 16(17.78,2.54) 17(20.32,0) 18(20.32,2.54) 19(22.86,0) 20(22.86,2.54) 21(25.4,0) 22(25.4,2.54) 23(27.94,0) 24(27.94,2.54) 25(30.48,0) 26(30.48,2.54) 27(33.02,0) 28(33.02,2.54) 29(35.56,0) 30(35.56,2.54) 31(38.1,0) 32(38.1,2.54) 33(40.64,0) 34(40.64,2.54) 35(43.18,0) 36(43.18,2.54)
  silkscreen extent -1.27,-1.96 44.5,3.81, body extent -1.27,-1.27 44.45,3.81, height 9
LM_3_5_90_04 [mm] "OMNIMATE Signal - Serie LM  LM 3.50/04/90 3.2"
  round 1.9 hole 1.3: A1(-5.25,0.25) A2(-1.75,0.25) A3(1.75,0.25) A4(5.25,0.25)
  silkscreen extent -7,-4.15 7.6,4.15, body extent -7,-4.15 7.6,4.15, height 12.81
"LQFP144_0R5_SKT - sin_zocalo_UWU" [mm] "32-bit MCU ARM-based Cortex-M3 20 X 20mm, 0.5mm Pitch, 1.6mm Max thickness"
  rect 0.3x1.65 smd: 1(-8.75,-10.625) 2(-8.25,-10.625) 3(-7.75,-10.625) 4(-7.25,-10.625) 5(-6.75,-10.625) 6(-6.25,-10.625) 7(-5.75,-10.625) 8(-5.25,-10.625) 9(-4.75,-10.625) 10(-4.25,-10.625) 11(-3.75,-10.625) 12(-3.25,-10.625) 13(-2.75,-10.625) 14(-2.25,-10.625) 15(-1.75,-10.625) 16(-1.25,-10.625) 17(-0.75,-10.625) 18(-0.25,-10.625) 19(0.25,-10.625) 20(0.75,-10.625) 21(1.25,-10.625) 22(1.75,-10.625) 23(2.25,-10.625) 24(2.75,-10.625) 25(3.25,-10.625) 26(3.75,-10.625) 27(4.25,-10.625) 28(4.75,-10.625) 29(5.25,-10.625) 30(5.75,-10.625) 31(6.25,-10.625) 32(6.75,-10.625) 33(7.25,-10.625) 34(7.75,-10.625) 35(8.25,-10.625) 36(8.75,-10.625) 73(8.75,10.625) 74(8.25,10.625) 75(7.75,10.625) 76(7.25,10.625) 77(6.75,10.625) 78(6.25,10.625) 79(5.75,10.625) 80(5.25,10.625) 81(4.75,10.625) 82(4.25,10.625) 83(3.75,10.625) 84(3.25,10.625) 85(2.75,10.625) 86(2.25,10.625) 87(1.75,10.625) 88(1.25,10.625) 89(0.75,10.625) 90(0.25,10.625) 91(-0.25,10.625) 92(-0.75,10.625) 93(-1.25,10.625) 94(-1.75,10.625) 95(-2.25,10.625) 96(-2.75,10.625) 97(-3.25,10.625) 98(-3.75,10.625) 99(-4.25,10.625) 100(-4.75,10.625) 101(-5.25,10.625) 102(-5.75,10.625) 103(-6.25,10.625) 104(-6.75,10.625) 105(-7.25,10.625) 106(-7.75,10.625) 107(-8.25,10.625) 108(-8.75,10.625)
  rect 1.65x0.3 smd: 37(10.625,-8.75) 38(10.625,-8.25) 39(10.625,-7.75) 40(10.625,-7.25) 41(10.625,-6.75) 42(10.625,-6.25) 43(10.625,-5.75) 44(10.625,-5.25) 45(10.625,-4.75) 46(10.625,-4.25) 47(10.625,-3.75) 48(10.625,-3.25) 49(10.625,-2.75) 50(10.625,-2.25) 51(10.625,-1.75) 52(10.625,-1.25) 53(10.625,-0.75) 54(10.625,-0.25) 55(10.625,0.25) 56(10.625,0.75) 57(10.625,1.25) 58(10.625,1.75) 59(10.625,2.25) 60(10.625,2.75) 61(10.625,3.25) 62(10.625,3.75) 63(10.625,4.25) 64(10.625,4.75) 65(10.625,5.25) 66(10.625,5.75) 67(10.625,6.25) 68(10.625,6.75) 69(10.625,7.25) 70(10.625,7.75) 71(10.625,8.25) 72(10.625,8.75) 109(-10.625,8.75) 110(-10.625,8.25) 111(-10.625,7.75) 112(-10.625,7.25) 113(-10.625,6.75) 114(-10.625,6.25) 115(-10.625,5.75) 116(-10.625,5.25) 117(-10.625,4.75) 118(-10.625,4.25) 119(-10.625,3.75) 120(-10.625,3.25) 121(-10.625,2.75) 122(-10.625,2.25) 123(-10.625,1.75) 124(-10.625,1.25) 125(-10.625,0.75) 126(-10.625,0.25) 127(-10.625,-0.25) 128(-10.625,-0.75) 129(-10.625,-1.25) 130(-10.625,-1.75) 131(-10.625,-2.25) 132(-10.625,-2.75) 133(-10.625,-3.25) 134(-10.625,-3.75) 135(-10.625,-4.25) 136(-10.625,-4.75) 137(-10.625,-5.25) 138(-10.625,-5.75) 139(-10.625,-6.25) 140(-10.625,-6.75) 141(-10.625,-7.25) 142(-10.625,-7.75) 143(-10.625,-8.25) 144(-10.625,-8.75)
  silkscreen extent -10,-12.27 10,10, body extent -10.03,-9.93 9.98,9.98, height 0.25
MCHP-SOIC-S2A8_N [mm] "SOIC, 8-Leads, Body 5.275x5.275mm, Pitch 1.27mm, IPC Medium Density"
  oval 1.7x0.6 smd: 1(-3.575,1.905) 2(-3.575,0.635) 3(-3.575,-0.635) 4(-3.575,-1.905) 5(3.575,-1.905) 6(3.575,-0.635) 7(3.575,0.635) 8(3.575,1.905)
  silkscreen extent -3.7,-2.7 2.33,2.88, body extent -2.7,-2.7 2.7,2.7, height 2.16
MOLEX_47590001 [mm] "USB Micro-B Connector"
  rect 0.4x1.35 smd: 1(1.3,0) 2(0.65,0) 3(0,0) 4(-0.65,0) 5(-1.3,0)
  oval 1.05x1.25 hole 0.65 slot 0.85 at 90 deg: 6(-2.225,0.325) 10(2.225,0.325)
  rect 1.4x1.9 hole 0.6 slot 1.3 at 90 deg copper offset 0.2,0: 7(-4.2,-2.675)
  rect 2.9x1.9 smd: 8(0,-2.675)
  rect 1.4x1.9 hole 0.6 slot 1.3 at 90 deg copper offset -0.2,0: 9(4.2,-2.675)
  silkscreen extent -4.95,-1.46 4.95,1.25, body extent -4.4,-5.29 4.4,0.44, height 2.71
OSC_2SM_3R2x2R5 [mm] "Crystal 8M Hz 3.2x2.5mm SMD"
  rect 1.5x2.7 smd: 1(-0.95,0) 2(0.95,0)
  body extent -1.6,-1.25 1.6,1.25, height 1
PB-6X6mm-Black [mm] "Surface Mounting Type Tact Switch, 4-Leads, Body 6x6mm, Height 4.5mm Black"
  rect 2.3x1.8 smd: 1(4.325,2.25) 2(4.325,-2.25) 3(-4.325,-2.25) 4(-4.325,2.25)
  silkscreen extent -2.83,-3 2.81,3, body extent -3,-3 3,3, height 10.5
PB-6X6mm-Blue [mm] "Surface Mounting Type Tact Switch, 4-Leads, Body 6x6mm, Height 4.5mm,Blue"
  rect 2.3x1.8 smd: 1(4.325,2.25) 2(4.325,-2.25) 3(-4.325,-2.25) 4(-4.325,2.25)
  silkscreen extent -2.83,-3 2.81,3, body extent -3,-3 3,3, height 10.5
QFN24_0R5_4X4 [mm] "SQFN 24 Pins, Pitch 0.5mm, 4mmx4mm"
  rect 0.69x0.28 smd: 1(-1.9,1.25) 2(-1.9,0.75) 3(-1.9,0.25) 4(-1.9,-0.25) 5(-1.9,-0.75) 6(-1.9,-1.25) 13(1.9,-1.25) 14(1.9,-0.75) 15(1.9,-0.25) 16(1.9,0.25) 17(1.9,0.75) 18(1.9,1.25)
  rect 0.28x0.69 smd: 7(-1.25,-1.9) 8(-0.75,-1.9) 9(-0.25,-1.9) 10(0.25,-1.9) 11(0.75,-1.9) 12(1.25,-1.9) 19(1.25,1.9) 20(0.75,1.9) 21(0.25,1.9) 22(-0.25,1.9) 23(-0.75,1.9) 24(-1.25,1.9)
  rect 2.5x2.5 smd: 25(0,0)
  silkscreen extent -2.46,-2.05 2.05,2.05, body extent -2.05,-2.05 2.05,2.05, height 1
RJ45_KRJ-CB4.2GYZNL [mm] "RJ45  connector, right angle"
  rect 1x1 hole 0.7: 1(3.57,2.65)
  round 1 hole 0.7: 2(2.55,3.75) 3(1.53,2.65) 4(0.51,3.75) 5(-0.51,2.65) 6(-1.53,3.75) 7(-2.55,2.65) 8(-3.57,3.75) 9(7.06,1.57) 10(4.77,1.57) 11(-4.77,1.57) 12(-7.06,1.57)
  oval 1x2.6 hole 0.7 slot 2.2 at 90 deg: 13(8.04,-3.75) 14(-8.04,-3.75)
  body extent -8.1,-11.75 8.08,3.47, height 6.8
SB_0603 [mil] "Jumper"
  rect 32x40 smd: 1(33.75,0) 2(-33.75,0)
  Top Layer region: -26.25,0 -16.25,0 3.75,-20 -26.25,-20
  Top Layer region: -26.25,0 -16.25,0 3.75,20 -26.25,20
  Top Layer region: 23.75,20 13.75,20 -6.25,0 13.75,-20 23.75,-20
SOD-323 [mm] "Diode"
  rect 1.35x0.4 smd: 1(-1.2,0) 2(1.2,0)
  silkscreen extent -1.4,-0.75 2.51,0.75, body extent -1.35,-0.72 1.35,0.72, height 1.17
SOT23-6L [mm]
  rect 1.1x0.6 smd: 1(-1.2,0.95) 2(-1.2,0) 3(-1.2,-0.95) 4(1.2,-0.95) 5(1.2,0) 6(1.2,0.95)
  silkscreen extent -1.32,-1.5 0.25,1.93, body extent -0.86,-1.51 0.87,1.52, height 1.25
SOT-23 [mm]
  rect 0.8x0.9 smd: 1(-0.98,-1) 2(0.98,-1) 3(0,1)
  silkscreen extent -1.95,-1.62 1.5,0.7, body extent -1.52,-0.7 1.52,0.7, height 1.11
SOT-23-5L [mil] "Enhanced single channel power switches"
  rect 30x16 smd: 1(-53.15,37.4) 2(-53.15,0) 3(-53.15,-37.4) 4(53.15,-37.4) 5(53.15,37.4)
  silkscreen extent -33,-58 32,57, body extent -34,-59 34,59, height 57
TAN-A [mil] "TAN Capacitor"
  rect 50x60 smd: 1(55,0) 2(-55,0)
  silkscreen extent -95,-45 130,45, body extent -47,-35 47,35, height 39
Transformer [mm]
  rect 0.64x1.4 smd: 1(-4.445,-4.51) 2(-3.175,-4.51) 3(-1.905,-4.51) 4(-0.635,-4.51) 5(0.635,-4.51) 6(1.905,-4.51) 7(3.175,-4.51) 8(4.445,-4.51) 9(4.445,4.51) 10(3.175,4.51) 11(1.905,4.51) 12(0.635,4.51) 13(-0.635,4.51) 14(-1.905,4.51) 15(-3.175,4.51) 16(-4.445,4.51)
  silkscreen extent -4.57,-6.09 -4.32,-5.84, body extent -6.4,-3 6.4,3, height 6
XTAL_2SM_3R2X1R5 [mm] "CRYSTAL 32.768KHZ 6PF SMD 2 pads"
  rect 1x1.8 smd: 1(-1.25,0) 2(1.25,0)
  silkscreen extent -0.28,-0.91 0.28,0.91, body extent -1.63,-0.75 1.58,0.75, height 0.89
XTAL_2SM_5R0X3R2 [mm] "CRYSTAL 25M Hz  30F SMD 2 pads"
  rect 1.8x2.2 smd: 1(-1.9,0) 2(1.9,0)
  silkscreen extent -0.4,-1.27 0.4,1.27, body extent -2.5,-1.6 2.5,1.6, height 1.3